# Altium PCB Brelok_MFU.PcbDoc
Units mm, origin at the board's own origin, x right, y up, seen from the top; angles counter-clockwise.
Board outline 38.38 x 50.08 mm, 2 copper layers (Top Layer, Bottom Layer); 42 components, 31 nets, 161 pads, 62 vias.
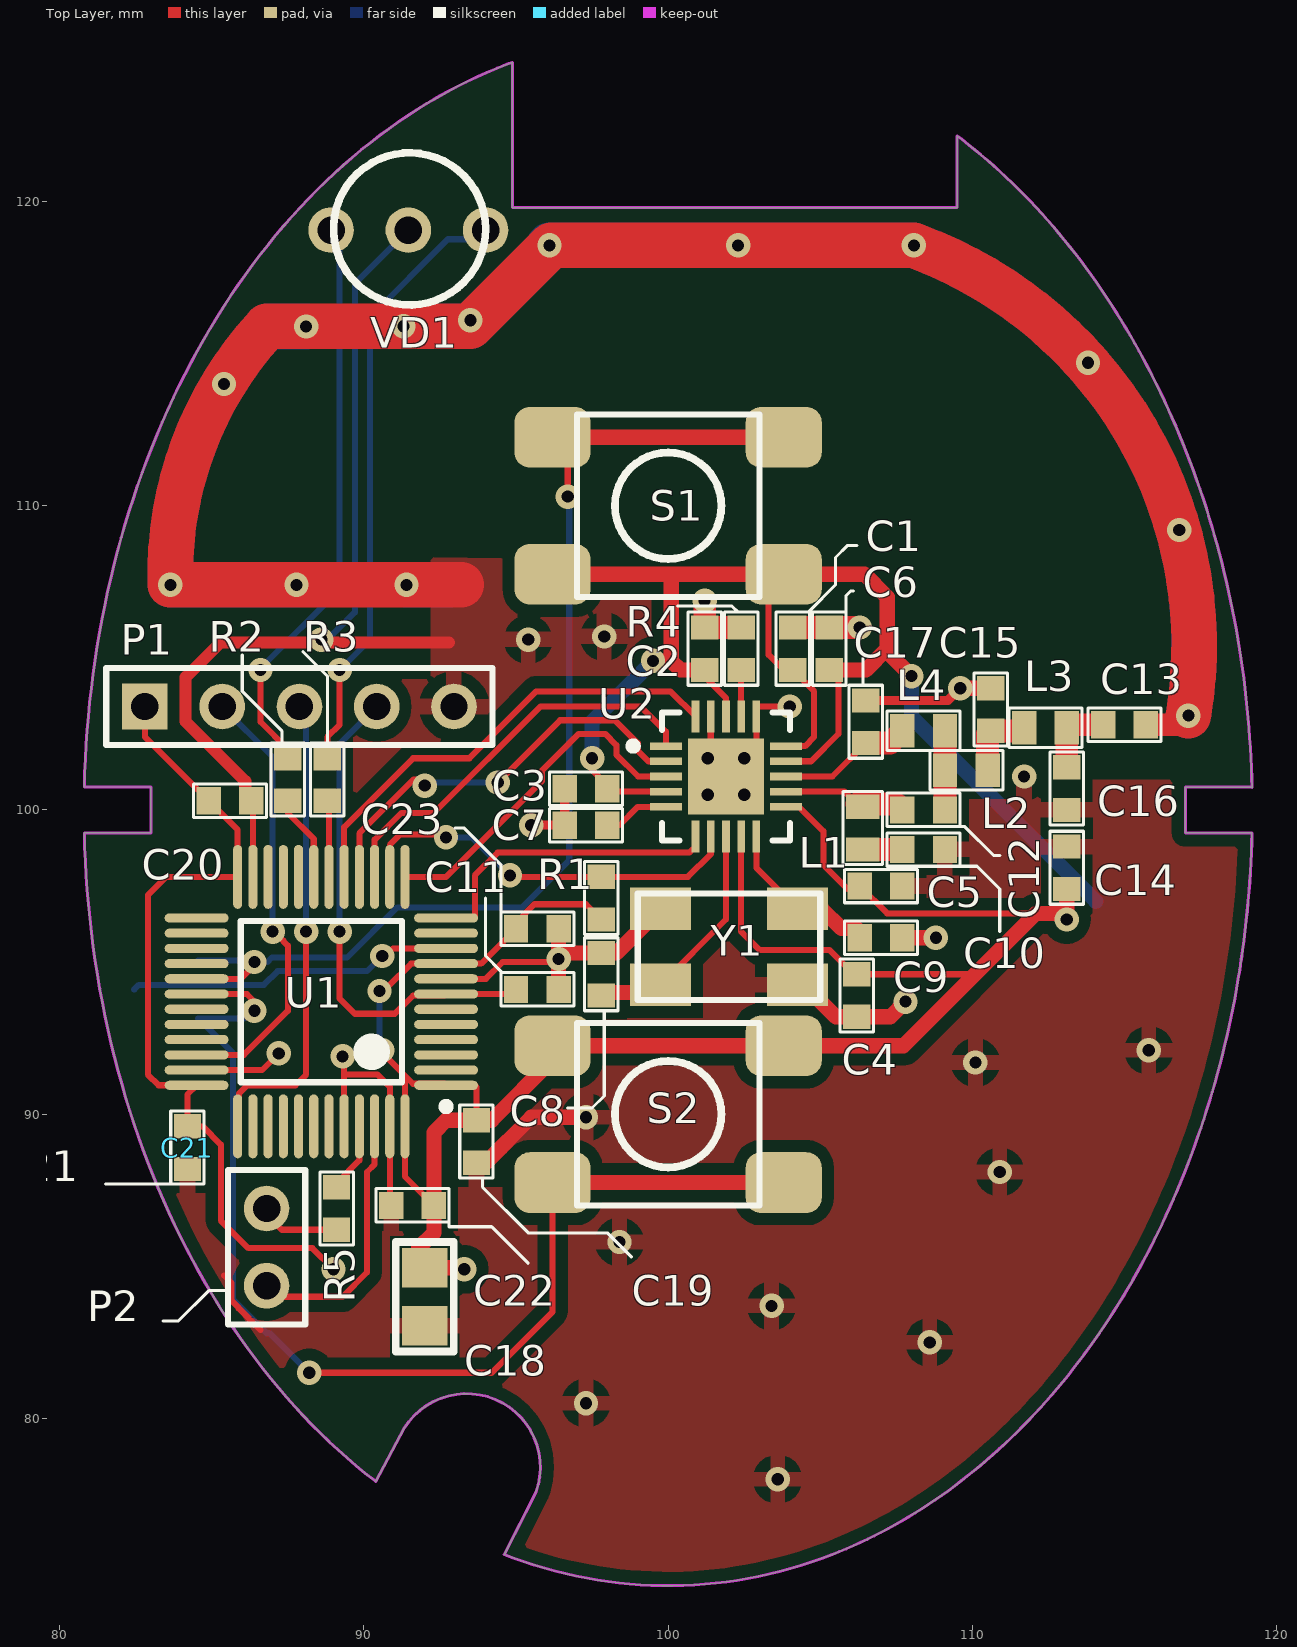
[diagram p0: Top Layer view]
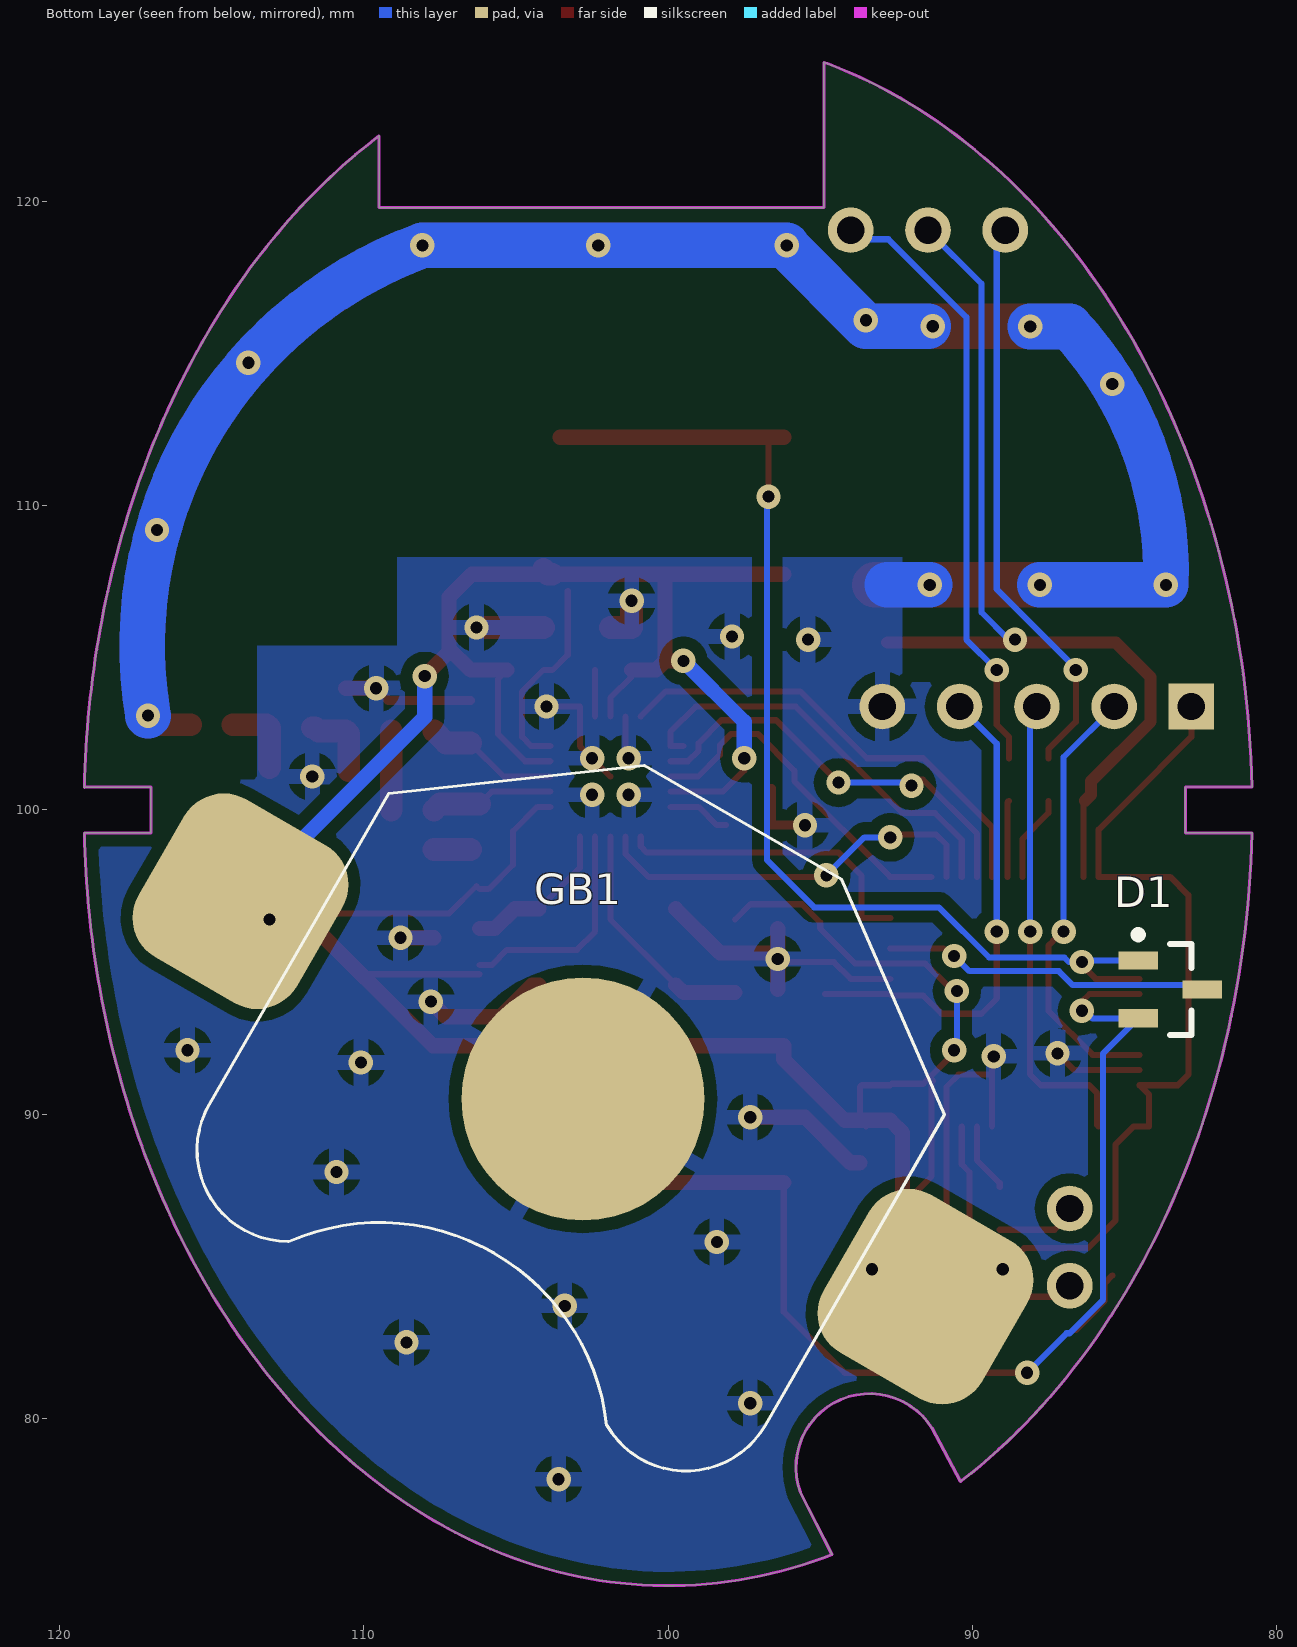
[diagram p1: Bottom Layer view, seen from below]

## Layer stack, top to bottom
Top Layer: signal copper 0.0356
Dielectric: dielectric 0.32, FR-4, Dk 4.8
Bottom Layer: signal copper 0.0356

## Board outline
357 vertices, not listed, extent 80.808,74.501 119.192,124.576

## Design rules (kind name [scope] priority, off if disabled: settings)
Clearance "Clearance_GND_VCC +3.3" [InNet('GND') vs InNet('VCC +3.3')] p1 off: gap=0.2
Clearance Clearance_U3_Trace [(IsTrack  And IsNet)  And InRegion(3815,3770 ,4275 ,4280) vs (IsTrack  And IsNet)  And InRegion(3815,3770 ,4275 ,4280)] p2: gap=0.2
Clearance Clearance_QFP_NET [InNet('SPI_MISO/DO','SPI_MOSI/DI','GND','VCC','GDO2','GDO0','SPI_SS','SPI_SCK','NetC3_1','NetC2_1','GND','NetC1_2','NetANT1_1','NetR1_2')  And InRegion(3815,3770 ,4275 ,4280) vs InNet('SPI_MISO','SPI_MOSI','GND','VCC','GDO2','GDO0','SPI_SS','SPI_SCK','NetC3_1','NetC2_1','GND')  And InRegion(3815,3770 ,4275 ,4280)] p3: gap=0.2
Clearance Clearance_QFP_Pins [InComponent('U2','U1') And IsPad] p4: gap=0.2
Clearance Clearance_GND [InPolygon] p5: gap=0.4
Clearance [All] p6: gap=0.25
ComponentClearance ComponentClearance_R1_C10 [InComponent('C10') vs InComponent('R1')] p1 off: gap=0 collisioncheckmode=3 verticalgap=0 showdistances=FALSE
ComponentClearance [All] p2 off: gap=0.3 collisioncheckmode=3 verticalgap=0.3 showdistances=FALSE
HoleSize [All] p1: absolutevalues=TRUE maxlimit=5 minlimit=0.3 maxpercent=80.000 minpercent=20.000
NetAntennae [All] p1 off: netantennaetolerance=50
PlaneConnect [All] p1: planeconnectstyle=Relief reliefexpansion=0.508 reliefentries=4 reliefconductorwidth=0.3 reliefairgap=0.3
PolygonConnect [All] p1: connectstyle=Relief reliefconductorwidth=0.5 reliefentries=4 polygonreliefangle="90 Angle"
RoutingCorners [All] p1: cornerstyle=45-Degree minsetback=2.54 maxsetback=5
RoutingVias [All] p1: holewidth=0.5 width=1.6 viastyle="Through Hole" minholewidth=0.3 minwidth=0.8 maxholewidth=1.5 maxwidth=2
ShortCircuit ShortCircuit_ANT1 [InComponent('ANT1')] p1: allowed=TRUE
ShortCircuit [All] p2: allowed=FALSE
SilkToSilkClearance [All] p1: silktosilkclearance=0.3
SilkscreenOverComponentPads [All] p1: minsilkscreentomaskgap=0.254
SolderMaskExpansion [All] p1: expansion=0.102
Width [All] p1: maxlimit=5 minlimit=0.2 preferedwidth=0.3
20 further rules are at their usual default settings.

## Components (designator, comment, footprint, x,y, rotation, side; value= is the part's Value field where it differs from the comment)
C1 "0805" C0603 104.1,105.3 r270 top
C2 "0805" C0603 101.2,105.3 r270 top
C3 "0805" C0603 97.3,100.7 r0 top
C4 "0805" C0603 106.2,93.9 r90 top
C5 "0805" C0603 107,97.5 r180 top
C6 "0805" C0603 105.3,105.3 r270 top
C7 "0805" C0603 97.3,99.5 r180 top
C8 "0805" C0603 97.8,94.6 r90 top
C9 "0805" C0603 107,95.8 r0 top
C10 "0805" C0603 108.4,98.7 r0 top
C11 "0805" C0603 95.7,94.1 r0 top
C12 "0805" C0603 108.4,100 r180 top
C13 "0805" C0603 115,102.8 r0 top
C14 "0805" C0603 113.1,98.1 r90 top
C15 "0805" C0603 110.6,103.3 r270 top
C16 "0805" C0603 113.1,100.7 r90 top
C17 "0805" C0603 106.5,102.9 r270 top
C18 "0805" C0805 92,84 r270 top
C19 "0805" C0603 93.7,89.1 r270 top
C20 "0805" C0603 85.6,100.3 r0 top
C21 "0805" C0603 84.2,88.9 r270 top
C22 "0805" C0603 91.6,87 r180 top
C23 "0805" C0603 95.7,96.1 r0 top
D1 "BAT54C" SOT23_N 83.5,94.1 r180 bottom
GB1 "CR2032" BAT_Holder_CR2032 102.8,90.5 r300 bottom
L1 "SMD" L0603 106.4,99.4 r270 top
L2 "SMD" L0603 109.8,101.3 r0 top
L3 "SMD" L0603 112.4,102.7 r0 top
L4 "SMD" L0603 108.4,102.6 r0 top
P1 "SWD_PORT" HDR1X5 82.8,103.4 r0 top
P2 "Buzzer" HDR1X2 86.8,86.9 r270 top
R1 "RES" C0603 97.8,97.1 r270 top
R2 "RES" C0603 87.5,101 r270 top
R3 "RES" C0603 88.8,101 r270 top
R4 "RES" C0603 102.4,105.3 r270 top
R5 "RES" C0603 89.1,86.9 r90 top
S1 "KAN0642-0501B" KAN0642-0501B 100,110 r180 top locked
S2 "KAN0642-0501B" KAN0642-0501B 100,90 r0 top locked
U1 "STM32F100C4T6" LQFP48_M 88.6,93.7 r180 top
U2 "CC1101" VQFN20 101.9,101.1 r0 top
VD1 "LIGHTDIODE2" LIGHTDIODE2 91.5,119.1 r0 top
Y1 "SMD" Quartz_SMD0603 102,95.5 r0 top

## Footprints (in the part's own frame and the unit in brackets; to place one, negate y for a bottom-side part, rotate by r counter-clockwise, add the part's x,y. Pads: shape width x height; smd on the part's side, far side on the other; paste and mask are expansions set on the pad)
BAT_Holder_CR2032 [mm] "BTH-W39-20"
  rrect50% 6x6 smd: +(0,-13) +(0,13)
  round 8 smd: -(0,0)
  silkscreen extent -10.5,-10.55 9.3,10.55
C0603 [mm]
  rect 0.8x0.9 smd: 1(-0.7,0) 2(0.7,0)
  silkscreen extent -1.2,-0.55 1.2,0.55, body extent -0.87,-0.48 0.87,0.48, height 1.3
C0805 [mm]
  rect 1.3x1.5 smd: 1(-0.95,0) 2(0.95,0)
  silkscreen extent -1.8,-0.95 1.8,0.95
HDR1X2 [mm] "Connector; Header; 2 Position"
  round 1.5 hole 0.9: 1(0,0) 2(2.54,0)
  silkscreen extent -1.27,-1.27 3.81,1.27
HDR1X5 [mm] "Connector; Header; 5 Position"
  rect 1.5x1.5 hole 0.9: 1(0,0)
  round 1.5 hole 0.9: 2(2.54,0) 3(5.08,0) 4(7.62,0) 5(10.16,0)
  silkscreen extent -1.27,-1.27 11.43,1.27
KAN0642-0501B [mm]
  rrect50% 2.5x2 smd: 1(-3.8,2.25) 1(3.8,2.25) 2(-3.8,-2.25) 2(3.8,-2.25)
  silkscreen extent -3,-3 3,3
L0603 [mm] "SMD_inductor 0603"
  rect 0.8x1.1 smd: 1(-0.7,0) 2(0.7,0)
  silkscreen extent -1.2,-0.65 1.2,0.65, body extent -0.87,-0.48 0.87,0.48, height 1.3
LIGHTDIODE2 [mm]
  round 1.5 hole 0.9: 1(-0.04,-0.04) 2(-2.58,-0.04) 3(2.5,-0.04)
  silkscreen extent -2.5,-2.5 2.5,2.5
LQFP48_M [mm] "Thin QFP, 48-Leads, Body 7x7mm, Pitch 0.5mm, IPC Low Density"
  oval 2.1x0.3 smd: 1(-4.1,2.75) 2(-4.1,2.25) 3(-4.1,1.75) 4(-4.1,1.25) 5(-4.1,0.75) 6(-4.1,0.25) 7(-4.1,-0.25) 8(-4.1,-0.75) 9(-4.1,-1.25) 10(-4.1,-1.75) 11(-4.1,-2.25) 12(-4.1,-2.75) 25(4.1,-2.75) 26(4.1,-2.25) 27(4.1,-1.75) 28(4.1,-1.25) 29(4.1,-0.75) 30(4.1,-0.25) 31(4.1,0.25) 32(4.1,0.75) 33(4.1,1.25) 34(4.1,1.75) 35(4.1,2.25) 36(4.1,2.75)
  oval 0.3x2.1 smd: 13(-2.75,-4.1) 14(-2.25,-4.1) 15(-1.75,-4.1) 16(-1.25,-4.1) 17(-0.75,-4.1) 18(-0.25,-4.1) 19(0.25,-4.1) 20(0.75,-4.1) 21(1.25,-4.1) 22(1.75,-4.1) 23(2.25,-4.1) 24(2.75,-4.1) 37(2.75,4.1) 38(2.25,4.1) 39(1.75,4.1) 40(1.25,4.1) 41(0.75,4.1) 42(0.25,4.1) 43(-0.25,4.1) 44(-0.75,4.1) 45(-1.25,4.1) 46(-1.75,4.1) 47(-2.25,4.1) 48(-2.75,4.1)
  silkscreen extent -4.23,-2.65 2.65,3.57, body extent -3.5,-3.5 3.5,3.5, height 1.6
Quartz_SMD0603 [mm]
  rect 2x1.4 smd: 1(-2.25,-1.25) 2(2.25,-1.25) 3(2.25,1.25) 4(-2.25,1.25)
  silkscreen extent -3,-1.75 3,1.75
SOT23_N [mm] "SOT23, 3-Leads, Body 2.9x1.3mm, Pitch 0.95mm, Lead Span 2.3mm, IPC Medium Density"
  rect 1.3x0.6 smd: 1(-1.05,0.95) 2(-1.05,-0.95) 3(1.05,0)
  silkscreen extent -1.18,-1.5 0.7,1.92, body extent -0.7,-1.5 0.7,1.5, height 1.1
VQFN20 [mm] "QFN, 20-Leads, Body 4,2x4,2mm (max), Pitch 0,50mm, IPC Low Density"
  rect 1.05x0.25 smd: 1(-1.975,1) 2(-1.975,0.5) 3(-1.975,0) 4(-1.975,-0.5) 5(-1.975,-1) 11(1.975,-1) 12(1.975,-0.5) 13(1.975,0) 14(1.975,0.5) 15(1.975,1)
  rect 0.25x1.05 smd: 6(-1,-1.975) 7(-0.5,-1.975) 8(0,-1.975) 9(0.5,-1.975) 10(1,-1.975) 16(1,1.975) 17(0.5,1.975) 18(0,1.975) 19(-0.5,1.975) 20(-1,1.975)
  rect 2.5x2.5 smd: 21(0,0)
  silkscreen extent -3.17,-2.1 2.1,2.1, body extent -2.07,-2.07 2.07,2.07, height 0.8

## Part data
C1 C2 C3 C4 C5 C6 C7 C8 C9 C10 C11 C12 C13 C14 C15 C16 C17 C18 C19 C20 C21 C22 C23: library part Capasitor_SMD_0805, "Capasitor_SMD_0808/"
D1: "Schottky Barrier Double Diode"
GB1: library part BAT_Holder_CR2032, "BTH-W39-20"
L1 L2 L3 L4: library part Induktor_SMD
P1: library part "Header 5", "Header, 5-Pin"
P2: library part "Header 2", "Header, 2-Pin"
R1 R2 R3 R4 R5: "Resistor"
U1: library part STM32F101C6T6, "STM32 ARM-based 32-bit MCU with 32 Kbytes Flash, 48-pin LQFP, Industrial Temperature"
Y1: library part Quartz_SMD

## Via types
v1: diameter 0.8, hole 0.4, Top Layer to Bottom Layer, tented both sides, 55 vias
v2: diameter 0.8, hole 0.4, Top Layer to Bottom Layer, tented bottom, 4 vias
v3: diameter 0.8, hole 0.4, Top Layer to Bottom Layer, tented top, 3 vias

## Nets (pads, with @x,y where several pads share a name; then routed paths per layer and width w, separated by ;. In a path a pad name is that pad's centre, name@x,y a point inside that pad or via, vN(x,y) a via of type N, cw(c..) or ccw(c..) an arc to the next point about the centre after c; other vN are vias at no path point)
GND: C1.1 C2.1 C3.1 C4.1 C5.1 C6.1 C7.2 C8.2 C9.2 C10.2 C11.2 C13.2 C14.2 C15.1 C16.1 C17.1 C18.2 C19.2 C20.2 C21.2 C22.2 C23.2 GB1.- P1.5 R4.1 U1.8 U1.23 U1.35 U1.44 U1.47 U2.16 U2.19 U2.21 VD1.1 Y1.2 Y1.4 | length 195.1
  Top Layer w0.2: U1.35 86.65,91.45 v1(87.2,92) ; 85.4,84.7 85.652,84.448 85.652,83.863 85.881,83.634 85.881,83.619 86.6,82.9 ; C20.2 86.35,100.25 U1.23 ; v1(89.3,91.9) 89.35,91.85 89.35,91.3 ; U1.44 89.35,91.3 ; C22.2 90.85,87.05 U1.47 90.85,90.9 90.45,91.3 89.35,91.3 ; U1.8 94.005,94.45 94.555,95 v1@96.4,95 ; U2.21@101.4,101.6 U2.19 ; U2.21 102.9,102.1 U2.16 102.9,103.4 v1(104,103.4)
  Top Layer w0.3: v1(95.5,99.5) C7.2 C3.1 ; C17.1 109.2,103.6 v1(109.6,104)
  Top Layer w0.4: C20.2 86.1,100.5 86.1,100.943 84.14,102.903 84.14,104.36 85.28,105.5 92.8,105.5
  Top Layer w0.5: C19.2 94,88.4 95.5,89.9 v1(97.3,89.9) ; C11.2 v1@96.4,95 ; C23.2 v1(96.4,95.1) v1@96.4,95 ; Y1.4 98.3,95.3 C8.2 96.7,95.3 v1@96.4,95 ; Y1.2 104.464,94.25 105.514,93.2 C4.1 107.3,93.2 v1(107.8,93.7) ; C9.2 v1(108.8,95.8) ; v1(109.6,104) C15.1
  Top Layer w0.75: v1(101.2,106.875) C2.1 101.9,106 ; C1.1 C6.1 v1(106.3,106) ; C13.2 116.8,102.8 v1(117.1,103.1)
  Top Layer w1.5: 86.8,115.9 93.5,115.9 96.157,118.557 v1(108.078,118.558) cw(c103.29,105.402) v1(117.1,103.1) ; 86.807,115.893 ccw(c95.633,107.762) 83.638,107.398 93.202,107.398
  Bottom Layer w0.2: v1(88.6,105.6) 88.8,105.6 89.7,106.5 89.7,117.3 VD1.1 ; v1(104,103.4) v1@104.1,103.4
  Bottom Layer w1.5: 86.808,115.893 ccw(c95.633,107.762) v1(83.639,107.398) v1(87.781,107.398) ; 87.008,115.893 v1(88.1,115.893) ; v1(91.4,107.4) 92.8,107.4 ; v1@91.456,115.9 93.5,115.9 v1@96.157,118.557 ; v1(96.1,118.558) v1(108.078,118.558) cw(c103.29,105.402) v1(117.1,103.1)
  other v1: 103.6,78 97.3,80.5 108.6,82.5 103.4,83.7 98.4,85.8 110.9,88.1 110.1,91.7 115.8,92.1 111.7,101.1 95.4,105.6 97.9,105.7 116.8,109.2 85.4,114 113.8,114.7 91.3,115.9 93.5,116.1 102.3,118.558
  other v2: 101.3,100.5 102.5,100.5 101.3,101.7 102.5,101.7
GP0: U1.12 U2.6 | length 10.3
  Top Layer w0.2: U1.12 93.65,96.45 93.65,97.85 94.4,98.6 100.7,98.6 100.9,98.8 U2.6
GP2: U1.13 U2.3 | length 11.5
  Top Layer w0.2: U1.13 92.7,97.8 95.85,100.95 95.85,101.295 97.055,102.5 97.931,102.5 98.3,102.131 98.3,101.816 99.016,101.1 U2.3
NetC7_1: C7.1 U2.5 | length 2.1
  Top Layer w0.2: C7.1@98.1,99.5 98.4,99.5 99,100.1 U2.5
NetC8_1: C8.1 U2.8 Y1.1 | length 7.8
  Top Layer w0.2: Y1.1 101.9,96.4 U2.8
  Top Layer w0.5: C8.1@97.8,94 99.5,94 Y1.1
NetC9_1: C9.1 U2.10 Y1.3 | length 5.2
  Top Layer w0.2: U2.10 102.9,98.1 Y1.3
  Top Layer w0.5: Y1.3 105.05,96.75 105.7,96.1 C9.1@106.2,96.1
NetC10_1: C10.1 L1.2 | length 1.2
  Top Layer w0.75: L1.2@106.5,98.7 C10.1
NetC12_1: C12.1 L2.1 L4.2 | length 2.6
  Top Layer w0.75: C12.1 L2.1 L4.2
NetC12_2: C12.2 L1.1 U2.12 | length 4.1
  Top Layer w0.2: U2.12 105.8,100.6 L1.1@106.2,100.2
  Top Layer w0.75: L1.1@106.2,100.2 107.5,100.2 C12.2
NetC13_1: C13.1 C16.2 L3.2 | length 2.5
  Top Layer w0.75: C16.2 L3.2 113.2,102.8 C13.1
NetC15_2: C15.2 L2.2 L3.1 | length 2.5
  Top Layer w0.75: L2.2 110.5,102.5 C15.2 111.5,102.6 111.6,102.7 L3.1
NetC17_2: C17.2 L4.1 U2.13 | length 4.4
  Top Layer w0.2: U2.13 105.4,101.1 C17.2
  Top Layer w0.75: C17.2 107.3,102.2 L4.1
NetD1_1: D1.1 S1.2 U1.29 | length 36.7
  Top Layer w0.2: U1.29 85.95,94.45 86.4,94.9 v1(86.4,95) ; v1(96.7,110.3) S1.2@96.7,112
  Top Layer w0.5: S1.2@96.2,112.25 S1.2@103.55,112.25
  Bottom Layer w0.2: D1.1 v1@86.25,95.05 ; v1(86.4,95) 86.824,95 86.974,95.15 89.45,95.15 91.1,96.8 95.2,96.8 96.75,98.35 96.75,110.3 v1(96.7,110.3)
NetD1_2: D1.2 S2.2 U1.30 | length 38.6
  Top Layer w0.2: U1.30 86.15,93.95 86.4,93.7 v1(86.4,93.4) ; v1@88,81.7 v1(88.2,81.5) 94.2,81.5 96.2,83.5 S2.2@96.2,87.75
  Top Layer w0.5: S2.2@96.2,87.75 S2.2@103.8,87.75
  Bottom Layer w0.2: v1(86.4,93.4) 86.4,93.5 86.05,93.15 D1.2 85.7,92 85.7,83.904 86.804,82.8 86.9,82.8 v1(88.2,81.5)
NetD1_3: D1.3 U1.10 | length 10.4
  Top Layer w0.2: 90.95,95.45 U1.10
  Bottom Layer w0.2: D1.3 82.6,94.25 86.711,94.25 87.161,94.7 90.1,94.7 v1(90.6,95.2)
NetP2_1: P2.1 R5.1 | length 2.6
  Top Layer w0.2: P2.1@86.7,86.8 87.3,86.2 R5.1
NetP2_2: P2.2 U1.46 | length 8.7
  Top Layer w0.2: P2.2@86.7,84.26 86.96,84 89.3,84 90.1,84.8 90.1,88.1 90.35,88.35 U1.46
NetR2_1: R2.1 VD1.2 | length 18.6
  Top Layer w0.2: v1(86.6,104.6) 86.6,102.9 87.5,102 R2.1
  Bottom Layer w0.2: v1(86.6,104.6) 86.6,104.661 89.2,107.261 89.2,118.48 VD1.2@88.92,118.76
NetR2_2: R2.2 U1.19 | length 2.9
  Top Layer w0.2: R2.2 87.5,99.9 88.35,99.05 U1.19
NetR3_1: R3.1 VD1.3 | length 19.9
  Top Layer w0.2: R3.1 88.8,102.4 89.2,102.8 v1(89.2,104.6)
  Bottom Layer w0.2: v1(89.2,104.6) 90.2,105.6 90.2,116.2 92.76,118.76 VD1.3@94,118.76
NetR3_2: R3.2 U1.18 | length 2.5
  Top Layer w0.2: R3.2 88.85,100.25 U1.18
NetR4_2: R4.2 U2.17 | length 1.5
  Top Layer w0.2: U2.17 R4.2
NetR5_2: R5.2 U1.45 | length 2.3
  Top Layer w0.2: R5.2 89.1,87.736 89.85,88.486 U1.45
NRST: C11.1 P1.4 U1.7 | length 16.2
  Top Layer w0.2: v1(89.2,96) 89.2,93.8 89.7,93.3 91.014,93.3 91.614,93.9 92.65,93.9 U1.7 C11.1@94.85,93.95
  Bottom Layer w0.2: v1(89.2,96) 89.2,102.18 P1.4
SPI_MISO: U1.16 U2.2 | length 13.9
  Top Layer w0.2: U1.16 89.85,99.227 91.623,101 91.8,101 v1(92,100.8) ; v1(94.4,100.9) 96.45,102.95 98.25,102.95 99,102.2 99,101.951 99.351,101.6 U2.2
  Bottom Layer w0.2: v1(92,100.8) 92.1,100.9 v1(94.4,100.9)
SPI_MOSI: U1.17 U2.20 | length 15.4
  Top Layer w0.2: U1.17 89.35,99.434 91.616,101.7 93.464,101.7 95.664,103.9 100.075,103.9 U2.20
SPI_SCK: U1.15 U2.1 | length 13.9
  Top Layer w0.2: U1.15 90.35,99.02 91.23,99.9 92.3,99.9 95.8,103.4 99.1,103.4 99.925,102.575 U2.1 U2.1@99.5,102.1
SPI_SS: R1.1 U1.14 U2.7 | length 13.2
  Top Layer w0.2: U1.14 90.85,98.85 91.2,99.2 92.6,99.2 v1(92.7,99.1) ; v1(94.8,97.85) 94.85,97.8 R1.1 100.649,97.8 101.4,98.551 U2.7
  Bottom Layer w0.2: v1(92.7,99.1) 93.55,99.1 v1(94.8,97.85)
SWCLK: P1.3 U1.37 | length 15.9
  Top Layer w0.2: U1.37 85.9,89.65 85.9,90.686 86.164,90.95 86.536,90.95 87.036,90.95 87.75,90.95 88.1,91.3 v1(88.1,96) v1@88.1,96.1
  Bottom Layer w0.2: P1.3 88.1,103.18 v1(88.1,96)
SWDIO: P1.2 U1.34 | length 15
  Top Layer w0.2: U1.34 86.05,91.95 87.5,93.4 87.5,95.539 87.35,95.689 87.35,95.7 v1@87.075,95.975 ; v1(87,96) v1@87.05,96 ; v1@87.1,96 v1@87.19,96 ; v1@87.19,96 v1@87.1,96 ; v1@87.05,96 v1@87.1,96 ; v1@87.05,96 87,95.95 87,95.9 v1@87.075,95.975 ; v1@87.05,96 v1@87.075,95.975 ; v1@87.075,95.975 v1@87.1,96
  Bottom Layer w0.2: P1.2 87,101.74 v1(87,96)
VCC: C1.2 C2.2 C3.2 C4.2 C5.2 C6.2 C14.1 C18.1 C19.1 C20.1 C21.1 C22.1 C23.1 GB1.+ P1.1 R1.2 S1.1 S2.1 U1.1 U1.9 U1.24 U1.36 U1.48 U2.4 U2.9 U2.11 U2.14 U2.15 U2.18 | length 152
  Top Layer w0.2: P1.1 82.8,102.4 C20.1 85.85,99.35 U1.24 83.5,97.8 82.9,97.2 82.9,91.3 83.25,90.95 U1.36 84.2,90.65 C21.1 84.7,89.6 85.3,89 85.3,86.5 86.2,85.6 88.3,85.6 v3(89,84.9) ; v1(90.511,94.05) 90.5,94.061 90.5,94.2 90.8,94.2 91.55,94.95 U1.9 93.85,94.95 C23.1 95,96.3 95.6,96.9 97.3,96.9 R1.2 ; v1(90.6,92.1) 90.6,92.014 91.614,91 92.65,91 U1.1 93.65,90.95 93.7,90.9 C19.1 C19.1@93.5,89.6 ; 91.3,91.1 91.35,91.05 U1.48 91.35,87.95 C22.1 ; v3@93.25,84.95 v3(93.3,84.9) ; U2.4 98.2,100.6 97.5,101.3 v1(97.5,101.7) ; C2.2 101.2,104.384 101.9,103.684 U2.18 ; U2.9 102.4,96 103,95.4 105.3,95.4 105.8,94.9 C4.2@106.2,94.9 ; S1.1@103.3,107.2 103.3,105.1 103.8,104.6 C1.2 104.8,103.9 104.8,102.4 104.5,102.1 U2.15 ; U2.11 104.3,100.1 105.1,99.3 105.1,98.2 105.9,97.4 C5.2@106.2,97.4 ; U2.14 104.7,101.6 105.6,102.5 105.6,104.3 C6.2 ; C4.2 110.1,94.6 ; C5.2 107.2,96.6 112.084,96.6 ; v1(97.5,101.7) 97.5,101.8 v1(97.5,101.7)
  Top Layer w0.5: v3@93.25,84.95 91.8,84.95 91.8,85.6 92.3,86.1 C22.1 92.3,89.4 92.7,89.8 C19.1 94.2,89.8 96.2,91.8 96.2,92.25 103.8,92.25 107.734,92.25 112.084,96.6 112.9,96.6 v3(113.1,96.4) C14.1 ; S1.1@96.2,107.75 100.1,107.75 ; v1(99.5,104.9) 100.1,104.9 ; C2.2 100.4,104.6 100.1,104.9 ; S1.1@103.8,107.75 100.1,107.75 ; S1.1@103.95,107.75 106.45,107.75 107.2,107 107.2,105.3 ; C6.2 106.5,104.6 107.2,105.3 ; v1(108,104.4) 107.2,105.2 107.2,105.3 ; 100.1,104.9 100.1,107.75
  Top Layer w0.75: S1.1@103.8,107.75 103.95,107.75 S1.1@104.1,107.9
  Bottom Layer w0.2: v1(90.511,94.05) 90.511,92.189 v1(90.6,92.1)
  Bottom Layer w0.5: v1(97.5,101.7) 97.5,102.9 v1(99.5,104.9) ; v1(108,104.4) 108,103.058 GB1.+@114.058,97
pads on no net: U1.2 U1.3 U1.4 U1.5 U1.6 U1.11 U1.20 U1.21 U1.22 U1.25 U1.26 U1.27 U1.28 U1.31 U1.32 U1.33 U1.38 U1.39 U1.40 U1.41 U1.42 U1.43

## Polygon pours and split planes (outlines as drawn)
GND on Top Layer "top" (solid, remove dead copper, pour order 2): 92.2,108.3 104.141,108.2 104.141,104.5 110.6,104.5 110.6,101 119.5,101 119.5,71.5 82.817,71.5 79.2,71.4 79.2,104.3 92.2,104.3
GND on Bottom Layer "BOT" (solid, remove dead copper, pour order 3): 92.3,108.3 108.9,108.3 108.9,105.4 113.5,105.4 113.5,101.1 113.6,101 119.6,101 119.6,74.5 119.7,74.4 77.6,74.4 77.6,104.2 92.3,104.2

## Keep-outs
Keep-Out Layer:
  lines w0.1: 80.808,100.75 80.822,101.216 80.842,101.682 80.868,102.147 80.901,102.612 80.94,103.075 80.986,103.538 81.038,103.999 81.096,104.46 81.16,104.918 81.231,105.375 81.309,105.83 81.392,106.283 81.482,106.735 81.578,107.183 81.68,107.63 81.788,108.074 81.902,108.515 82.022,108.953 82.149,109.389 82.281,109.821 82.419,110.25 82.563,110.675 82.713,111.097 82.869,111.515 83.031,111.93 83.198,112.34 83.371,112.746 83.549,113.148 83.733,113.546 83.922,113.939 84.117,114.327 84.317,114.711 84.522,115.089 84.733,115.463 84.948,115.831 85.169,116.194 85.394,116.552 85.625,116.904 85.86,117.25 86.1,117.591 86.345,117.926 86.594,118.255 86.848,118.577 87.106,118.894 87.368,119.204 87.635,119.508 87.906,119.805 88.181,120.096 88.459,120.379 88.742,120.656 89.028,120.927 89.319,121.19 89.612,121.446 89.909,121.694 90.21,121.936 90.514,122.17 90.821,122.397 91.131,122.616 91.444,122.828 91.76,123.032 92.078,123.228 92.4,123.417 92.724,123.598 93.05,123.771 93.379,123.936 93.709,124.093 94.042,124.241 94.377,124.382 94.714,124.515 94.879,124.575 ; 80.809,100.76 83,100.75 83,99.25 80.808,99.25 80.822,98.78 80.842,98.311 80.869,97.842 80.902,97.373 80.942,96.906 80.988,96.44 81.041,95.975 81.1,95.511 81.165,95.049 81.237,94.588 81.316,94.13 81.4,93.673 81.491,93.219 81.589,92.767 81.692,92.317 81.802,91.87 81.918,91.425 82.04,90.984 82.168,90.546 82.303,90.11 82.443,89.679 82.589,89.25 82.742,88.826 82.9,88.405 83.064,87.988 83.233,87.575 83.409,87.167 83.59,86.763 83.776,86.363 83.968,85.968 84.166,85.578 84.369,85.192 84.577,84.812 84.791,84.437 85.009,84.067 85.233,83.702 85.462,83.343 85.696,82.99 85.934,82.643 86.178,82.301 86.426,81.966 86.679,81.636 86.936,81.313 87.198,80.996 87.464,80.686 87.734,80.382 88.008,80.085 88.287,79.795 88.57,79.511 88.856,79.235 89.146,78.965 89.44,78.703 89.738,78.448 90.039,78.2 90.343,77.96 90.391,77.924 91.329,79.683 cw(c93.378,78.395) 95.655,77.572 94.612,75.525 ; 94.612,75.525 94.9,75.416 95.243,75.295 95.587,75.183 95.932,75.079 96.279,74.984 96.627,74.897 96.976,74.818 97.326,74.749 97.677,74.687 98.029,74.635 98.381,74.591 98.735,74.555 99.088,74.529 99.442,74.511 99.796,74.501 100.15,74.501 100.504,74.509 100.858,74.525 101.212,74.551 101.565,74.585 101.917,74.627 102.269,74.679 102.621,74.739 102.971,74.807 103.32,74.884 103.668,74.97 104.015,75.064 104.361,75.166 104.705,75.277 105.047,75.397 105.388,75.525 105.622,75.618 105.854,75.714 106.086,75.815 106.317,75.92 106.546,76.028 106.775,76.14 107.003,76.256 107.229,76.376 107.454,76.5 107.678,76.628 107.901,76.759 108.123,76.894 108.343,77.033 108.562,77.176 108.779,77.322 108.995,77.472 109.21,77.625 109.423,77.782 109.635,77.943 109.845,78.107 110.053,78.275 110.26,78.446 110.465,78.621 110.669,78.799 110.871,78.981 111.071,79.166 111.269,79.354 111.465,79.546 111.66,79.741 111.853,79.939 112.044,80.14 112.232,80.345 112.419,80.553 112.604,80.764 112.787,80.978 112.968,81.195 113.147,81.415 113.323,81.639 113.498,81.865 113.67,82.094 113.84,82.326 114.008,82.56 114.173,82.798 114.337,83.038 114.498,83.282 114.656,83.527 114.813,83.776 114.966,84.027 115.118,84.281 115.267,84.537 115.414,84.795 115.558,85.057 115.699,85.32 115.838,85.586 115.975,85.854 116.109,86.125 116.24,86.397 116.369,86.672 116.495,86.949 116.618,87.229 116.739,87.51 116.857,87.793 116.973,88.078 117.085,88.365 117.195,88.654 117.302,88.945 117.406,89.238 117.508,89.532 117.606,89.828 117.702,90.126 117.795,90.425 117.885,90.726 117.972,91.029 118.057,91.332 118.138,91.637 118.217,91.944 118.292,92.252 118.365,92.561 118.434,92.871 118.501,93.183 118.565,93.495 118.625,93.809 118.683,94.123 118.738,94.439 118.789,94.755 118.838,95.072 118.884,95.39 118.926,95.709 118.966,96.029 119.002,96.349 119.036,96.669 119.066,96.991 119.093,97.312 119.117,97.635 119.138,97.957 119.156,98.28 119.171,98.603 119.183,98.926 119.192,99.25 117,99.25 117,100.75 119.192,100.75 ; 94.879,124.576 94.879,119.8 109.5,119.8 109.5,122.16 109.656,122.041 109.868,121.874 110.079,121.704 110.288,121.53 110.496,121.353 110.701,121.172 110.905,120.987 111.107,120.8 111.308,120.608 111.506,120.414 111.703,120.216 111.897,120.014 112.09,119.81 112.281,119.602 112.469,119.391 112.656,119.176 112.84,118.959 113.023,118.738 113.203,118.514 113.381,118.287 113.557,118.057 113.73,117.825 113.902,117.589 114.071,117.35 114.237,117.109 114.402,116.864 114.564,116.617 114.723,116.367 114.88,116.115 115.035,115.859 115.187,115.602 115.337,115.341 115.484,115.078 115.628,114.813 115.77,114.545 115.91,114.274 116.047,114.002 116.181,113.727 116.312,113.45 116.441,113.17 116.567,112.888 116.69,112.605 116.811,112.319 116.929,112.031 117.044,111.741 117.156,111.449 117.265,111.156 117.372,110.86 117.475,110.563 117.576,110.264 117.674,109.963 117.769,109.66 117.861,109.356 117.95,109.051 118.036,108.744 118.119,108.435 118.199,108.125 118.276,107.814 118.35,107.502 118.421,107.188 118.489,106.873 118.554,106.557 118.616,106.24 118.675,105.922 118.731,105.602 118.784,105.282 118.833,104.961 118.88,104.639 118.923,104.317 118.963,103.994 119,103.67 119.034,103.345 119.065,103.02 119.093,102.695 119.117,102.369 119.138,102.042 119.157,101.715 119.172,101.388 119.183,101.061 119.192,100.734

## Other copper
Top Layer:
  pour cut-out: 85.7,96.7 91.5,96.7 91.5,90.7 85.7,90.7

## Silkscreen, mask and mechanical layers (free items; w line width, h text height)
Top Overlay:
  lines w0.1: 81.5,87.7 83.65,87.7 ; 83.4,83.2 83.9,83.2 84.9,84.2 85.53,84.2 ; 86,105.1 86,103.9 87.3,102.6 87.3,102.1 ; 88,105.2 88.8,104.4 88.8,102.13 ; 92.8,86.45 92.8,86.3 94.2,86.3 95.4,85.1 ; 93,99.4 93.3,99.4 94.5,98.2 94.5,96.65 ; 93.9,87.9 93.9,87.6 95.4,86.1 98,86.1 98.8,85.3 ; 94,97.1 94,95.2 94.5,94.7 94.5,94.65 ; 96.7,90.2 97.5,90.2 97.9,90.6 97.9,93.4 ; 100.3,106.7 102.1,106.7 102.3,106.5 102.4,106.5 ; 104.65,106.5 104.65,106.55 105.5,107.4 105.5,108.3 105.9,108.7 106.2,108.7 ; 105.85,106.5 105.85,107.05 106,107.2 106.1,107.2 ; 106.4,104.1 106.4,105 ; 109.6,98.15 110.15,98.15 110.9,97.4 110.9,96 ; 109.6,99.45 109.75,99.45 110.7,98.5 110.9,98.5
Mechanical 1:
  drawing of 348 lines, arcs and shapes, not listed